# Altium PCB PCB1.PcbDoc
Units mil, origin at the board's own origin, x right, y up, seen from the top; angles counter-clockwise.
Board outline 2685 x 2837 mil, 2 copper layers (Top Layer, Bottom Layer); 50 components, 54 nets, 172 pads, 4 vias.
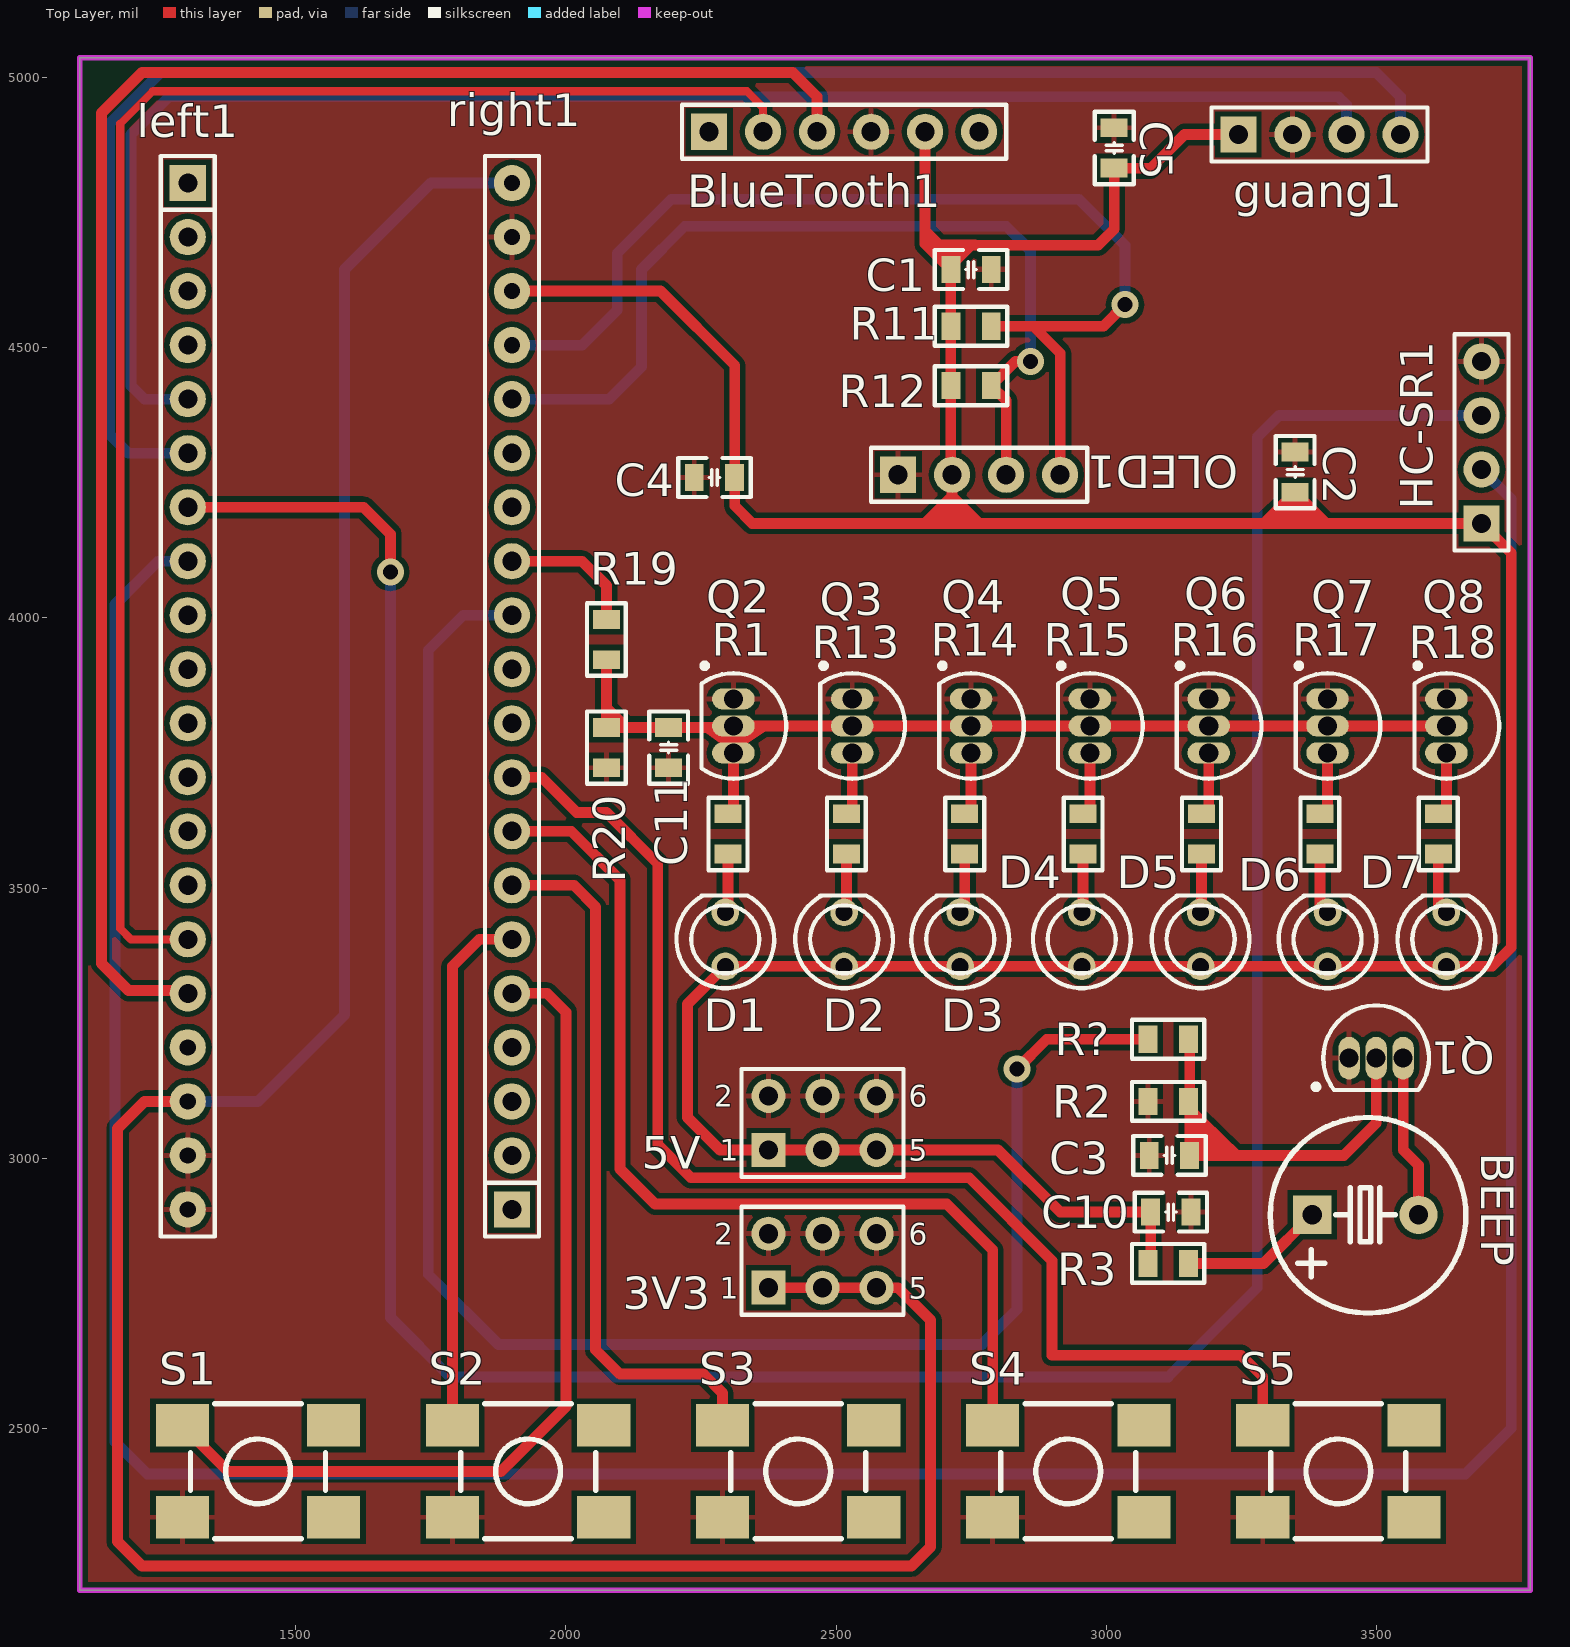
[diagram p0: Top Layer view]
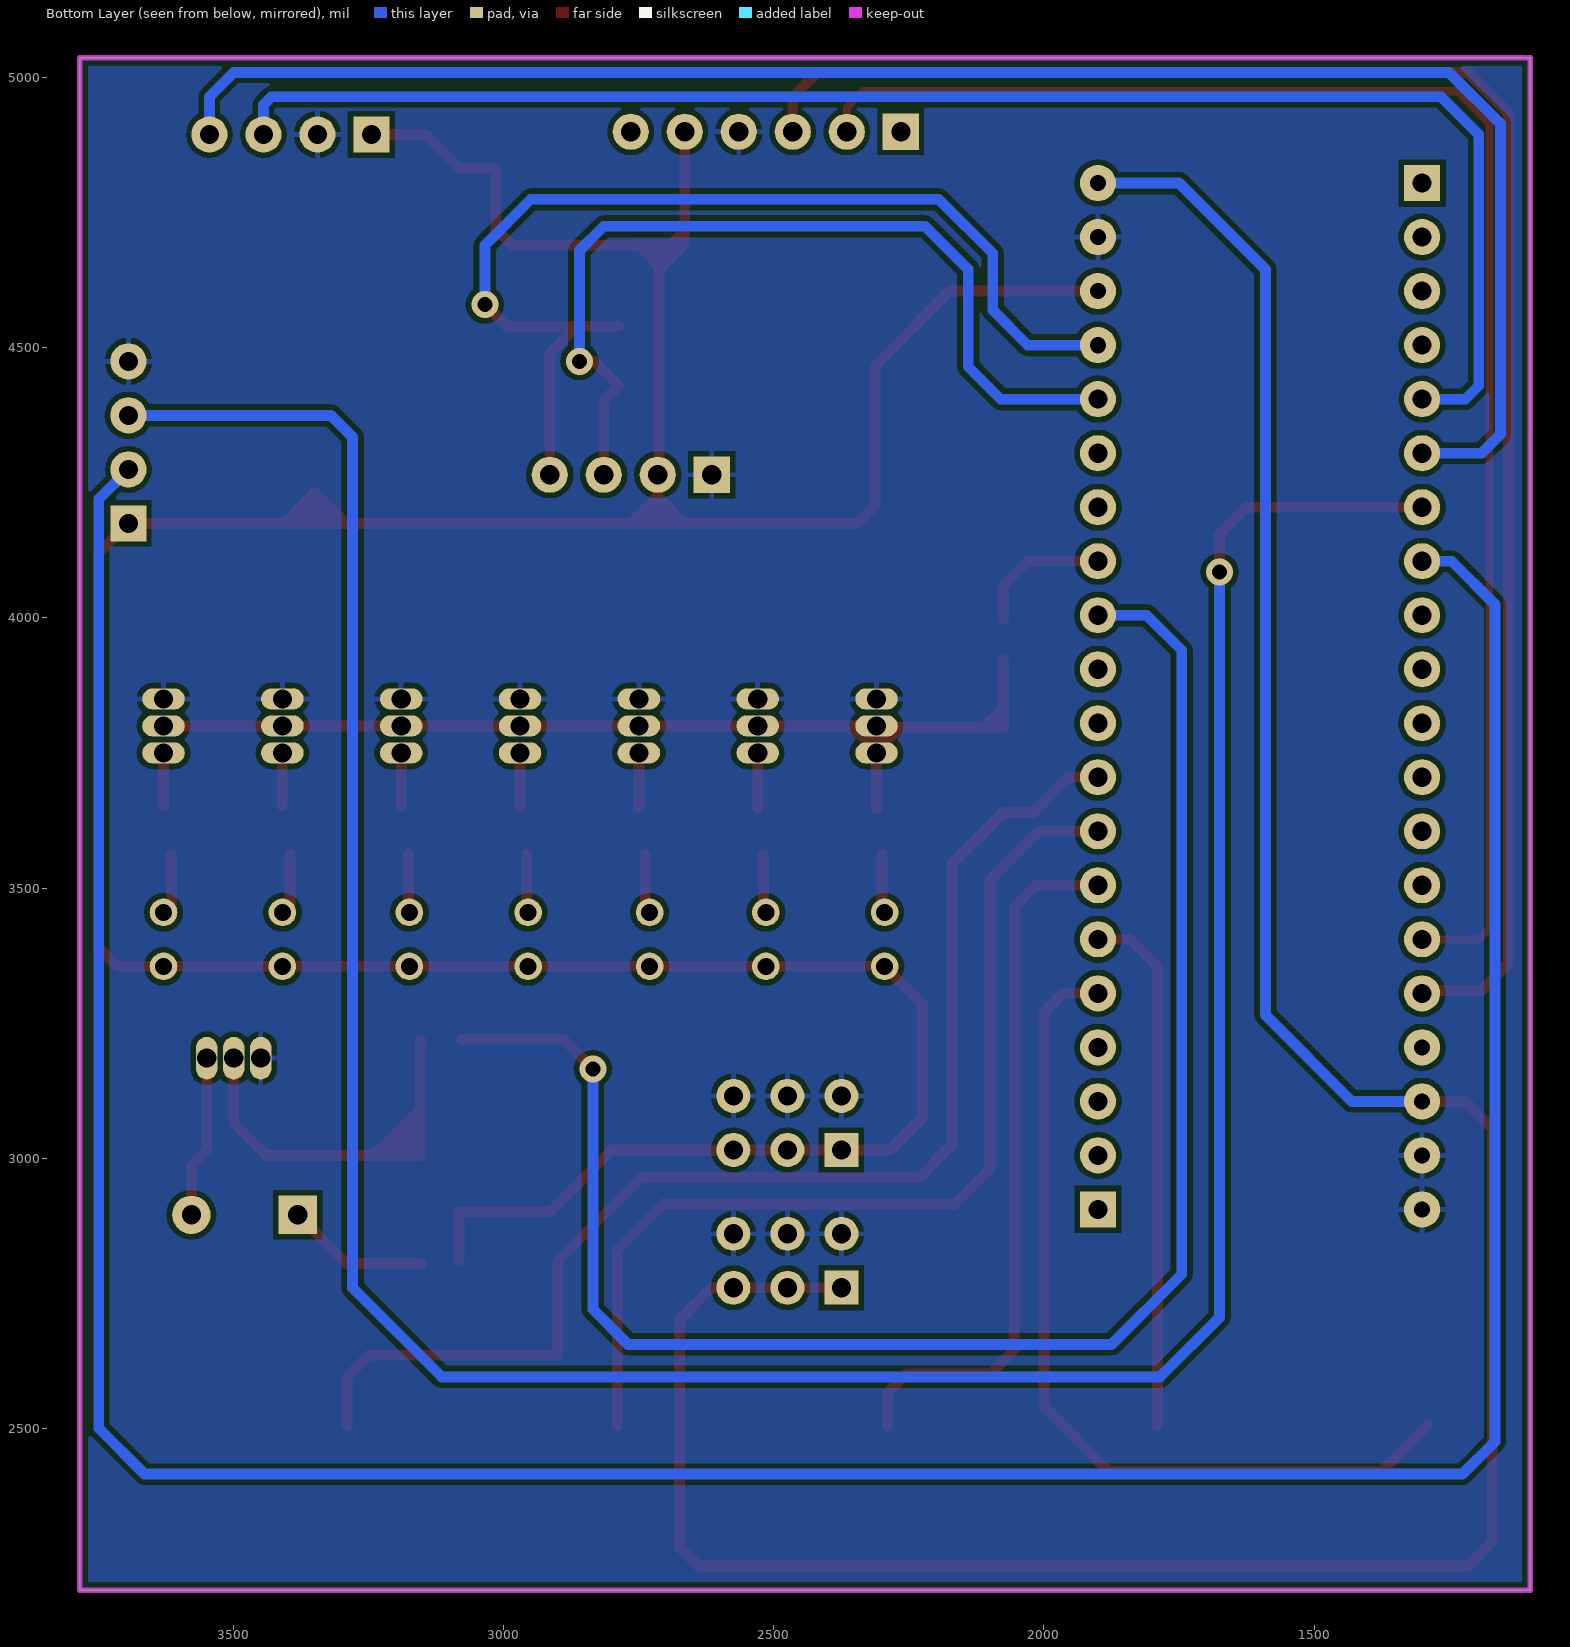
[diagram p1: Bottom Layer view, seen from below]

## Layer stack, top to bottom
Top Solder: solder mask 0.4, Solder Resist, Dk 3.5
Top Layer: signal copper 1.4
Dielectric 1: dielectric 12.6, FR-4, Dk 4.8
Bottom Layer: signal copper 1.4
Bottom Solder: solder mask 0.4, Solder Resist, Dk 3.5

## Board outline
1100,2200 3785,2200 3785,5037 1100,5037

## Design rules (kind name [scope] priority, off if disabled: settings)
Clearance [All] p1: gap=10
PolygonConnect [All] p1: connectstyle=Relief reliefconductorwidth=10 reliefentries=4 polygonreliefangle="90 Angle" airgapwidth=10
RoutingVias [All] p1: holewidth=28 width=50 viastyle="Through Hole" minholewidth=28 minwidth=50 maxholewidth=28 maxwidth=50
SolderMaskExpansion [All] p1: expansion=4
Width Width_3V3 [InNet('3V3')] p1: maxlimit=30 minlimit=20 preferedwidth=20
Width Width_5V [InNet('5V')] p2: maxlimit=30 minlimit=20 preferedwidth=20 minimp=50.000000 maximp=50.000000 favimp=50.000000
Width [All] p3: maxlimit=30 minlimit=10 preferedwidth=12 minimp=50.000000 maximp=50.000000 favimp=50.000000
30 further rules are at their usual default settings.

## Components (designator, comment, footprint, x,y, rotation, side; value= is the part's Value field where it differs from the comment)
3V3 "Header3X2" HDR2.54-LI-2x3P 2475,2810 r0 top (schematic designator JP1)
5V "Header3X2" HDR2.54-LI-2x3P 2475,3065 r0 top (schematic designator JP2)
BEEP "DC5V" "BEEP 5x9x5.5" 3480,2895 r270 top (schematic designator LS1)
BlueTooth1 "HDR-1X6" HDR2.54-LI-6P 2515,4900 r0 top
C1 "100nf" "C 0805_L" 2750,4645 r180 top
C2 "100nf" "C 0805_L" 3350,4270 r90 top
C3 "0.1uf" "C 0805_L" 3117.4,3005 r0 top
C4 "100nf" "C 0805_L" 2275,4260 r180 top
C5 "100nf" "C 0805_L" 3015,4870 r270 top
C10 "100nf" "C 0805_L" 3120,2900 r0 top
C11 "100nf" "C 0805_L" 2190,3760 r270 top
D1 "LED" LED_A2 2295,3405 r270 top
D2 "LED" LED_A2 2515,3405 r270 top
D3 "LED" LED_A2 2730,3405 r270 top
D4 "LED" LED_A2 2955,3405 r270 top
D5 "LED" LED_A2 3175,3405 r270 top
D6 "LED" LED_A2 3410,3405 r270 top
D7 "LED" LED_A2 3630,3405 r270 top
guang1 "HDR-1X4" HDR2.54-LI-4P 3395,4895 r0 top
HC-SR1 "HDR-1X4" HDR2.54-LI-4P 3695,4325 r90 top
left1 "HDR-1X20" HDR2.54-LI-20P 1300,3855 r270 top
OLED1 "HDR-1X4" HDR2.54-LI-4P 2765,4265 r0 top
Q1 "2N3904" TO-92A 3500,3185 r270 top
Q2 "2N3904" TO-92A 2310,3800 r180 top
Q3 "2N3904" TO-92A 2530,3800 r180 top
Q4 "2N3904" TO-92A 2750,3800 r180 top
Q5 "2N3904" TO-92A 2970,3800 r180 top
Q6 "2N3904" TO-92A 3190,3800 r180 top
Q7 "2N3904" TO-92A 3410,3800 r180 top
Q8 "2N3904" TO-92A 3630,3800 r180 top
R1 "300R" "R 0805_L" 2300,3600 r270 top
R2 "2K" "R 0805_L" 3115,3105 r180 top
R3 "33R" "R 0805_L" 3115,2805 r180 top
R11 "2K" "R 0805_L" 2750,4540 r0 top
R12 "2K" "R 0805_L" 2750,4430 r0 top
R13 "300R" "R 0805_L" 2519.17,3600 r270 top
R14 "300R" "R 0805_L" 2738.33,3600 r270 top
R15 "300R" "R 0805_L" 2957.5,3600 r270 top
R16 "300R" "R 0805_L" 3176.67,3600 r270 top
R17 "300R" "R 0805_L" 3395.83,3600 r270 top
R18 "300R" "R 0805_L" 3615,3600 r270 top
R19 "300R" "R 0805_L" 2075,3960 r270 top
R20 "10k" "R 0805_L" 2075,3760 r90 top
R? "2K" "R 0805_L" 3115,3220 r180 top
right1 "HDR-1X20" HDR2.54-LI-20P 1900,3855 r90 top
S1 "光敏开关" SW_PB4_A1 1430,2420 r0 top
S2 "超声波" SW_PB4_A1 1930,2420 r0 top
S3 "蓝牙" SW_PB4_A1 2430,2420 r0 top
S4 "增量" SW_PB4_A1 2930,2420 r0 top
S5 "减量" SW_PB4_A1 3430,2420 r0 top

## Footprints (in the part's own frame and the unit in brackets; to place one, negate y for a bottom-side part, rotate by r counter-clockwise, add the part's x,y. Pads: shape width x height; smd on the part's side, far side on the other; paste and mask are expansions set on the pad)
"BEEP 5x9x5.5" [mm] "5*9*5.5mm(脚距,直径,高度)        淘宝ID:黄晶宝石"
  rect 1.8x1.8 hole 0.9: 1(0,-2.5)
  round 1.8 hole 0.9: 2(0,2.5)
  silkscreen extent -4.57,-4.47 4.62,4.73, body extent -4.5,-4.5 4.5,4.5, height 5.45
"C 0805_L" [mil] "无极性贴片电容                                        淘宝ID:黄晶宝石"
  rect 35x50 smd: 1(-37.4,0) 2(37.4,0)
  silkscreen extent -67,-36 67,36, body extent -39,-24 39,24, height 20
HDR2.54-LI-2x3P [mm] "封装库来自淘宝卖家 ID：黄晶宝石"
  rect 1.6x1.6 hole 0.9: 1(-2.54,-1.27)
  round 1.6 hole 0.9: 2(-2.54,1.27) 3(0,-1.27) 4(0,1.27) 5(2.54,-1.27) 6(2.54,1.27)
  silkscreen extent -3.81,-2.54 3.81,2.54, body extent -3.81,-2.54 3.81,2.54, height 8.5
HDR2.54-LI-4P [mm] "排针，4脚"
  rect 1.7x1.7 hole 0.9: 1(-3.81,0)
  round 1.7 hole 0.9: 2(-1.27,0) 3(1.27,0) 4(3.81,0)
  silkscreen extent -5.08,-1.27 5.08,1.27, body extent -5.08,-1.27 5.08,1.27, height 8.5
HDR2.54-LI-6P [mm] "排针，6脚"
  rect 1.7x1.7 hole 0.9: 1(-6.35,0)
  round 1.7 hole 0.9: 2(-3.81,0) 3(-1.27,0) 4(1.27,0) 5(3.81,0) 6(6.35,0)
  silkscreen extent -7.62,-1.27 7.62,1.27, body extent -7.62,-1.27 7.62,1.27, height 8.5
HDR2.54-LI-20P [mm] "排针，20脚"
  rect 1.7x1.7 hole 0.9: 1(-24.13,0)
  round 1.7 hole 0.9: 2(-21.59,0) 3(-19.05,0) 4(-16.51,0) 5(-13.97,0) 6(-11.43,0) 7(-8.89,0) 8(-6.35,0) 9(-3.81,0) 10(-1.27,0) 11(1.27,0) 12(3.81,0) 13(6.35,0) 14(8.89,0) 15(11.43,0) 16(13.97,0)
  round 1.7 hole 0.762: 17(16.51,0) 18(19.05,0) 19(21.59,0) 20(24.13,0)
  silkscreen extent -25.4,-1.27 25.4,1.27, body extent -25.4,-1.27 25.4,1.27, height 8.5
LED_A2 [mm] "直径3MM二极管"
  round 1.3 hole 0.8: 1(1.27,0) 2(-1.27,0)
  silkscreen extent -2.06,-2.3 2.3,2.3
"R 0805_L" [mil] "1/8W贴片电阻"
  rect 35x50 smd: 1(-37.4,0) 2(37.4,0)
  silkscreen extent -67,-36 67,36, body extent -39,-25 39,25, height 20
SW_PB4_A1 [mil]
  rect 98.42x78.74 smd: 1(-140,85) 2(-140,-85) 3(140,-85) 4(140,85)
  silkscreen extent -125,-125 125,125, body extent -125,-125 125,125, height 236
TO-92A [mm] "TO, Flat Index; 3 In-Line, Axial Leads; Body Dia. 4.5mm; Leads 0.51 x 0.48 mm (max)"
  oval 2x1 hole 0.9: 1(0,-1.27) 2(0,0) 3(0,1.27)
  silkscreen extent -2.48,-2.95 1.5,2.48, body extent -2.5,-2.5 1.5,2.5, height 6.86

## Part data
3V3 5V: library part "Header 3X2", "3*2P接插件"
BEEP: library part BEEP, "蜂鸣器"
BlueTooth1: library part "Header 6", "6P接插件"
C1 C2 C3 C4 C5 C10 C11: library part C, "贴片电容"
D1 D2 D3 D4 D5 D6 D7: "发光二极管"
guang1 HC-SR1 OLED1: library part "Header 4", "4P接插件"
left1 right1: library part "Header 20", "20P接插件"
Q1 Q2 Q3 Q4 Q5 Q6 Q7 Q8: "NPN General Purpose Amplifier"
R1 R2 R3 R11 R12 R13 R14 R15 R16 R17 R18 R19 R20 R?: library part R, "贴片电阻"
S1 S2 S3 S4 S5: library part SW-PB4, "微动开关"

## Via types
v1: diameter 50, hole 28, Top Layer to Bottom Layer, 4 vias

## Nets (pads, with @x,y where several pads share a name; then routed paths per layer and width w, separated by ;. In a path a pad name is that pad's centre, name@x,y a point inside that pad or via, vN(x,y) a via of type N, cw(c..) or ccw(c..) an arc to the next point about the centre after c; other vN are vias at no path point)
3V3: 3V3.1 3V3.3 3V3.5 left1.18 right1.20 | length 5311.2
  Top Layer w20: left1.18 1220,3105 1170,3055 1170,2290 1215,2245 2640,2245 2675,2280 2675,2700 2615,2760 3V3.5 3V3.3 3V3.1
  Bottom Layer w20: left1.18 1430,3105 1590,3265 1590,4645 1750,4805 right1.20
5V: 5V.1 5V.3 5V.5 BlueTooth1.5 C1.2 C2.1 C4.1 C5.2 C10.1 D1.1 D2.1 D3.1 D4.1 D5.1 D6.1 D7.1 guang1.1 HC-SR1.1 OLED1.2 R3.2 R11.1 R12.1 right1.18 | length 7219.6
  Top Layer w20: right1.18 2175,4605 2312.4,4467.6 C4.1 2312.4,4207.6 2345,4175 2665,4175 2715,4225 ; BlueTooth1.5 2665,4692.6 C1.2 ; OLED1.2@2712.6,4267.4 C1.2 ; OLED1.2 2715,4225 ; R3.2@3082.6,2810 C10.1 2915,2900 2800,3015 5V.5 5V.3 5V.1 2285,3015 2225,3075 2225,3285 D1.1 D2.1 D3.1 D4.1 D5.1 D6.1 D7.1 3715,3355 3750,3390 3750,4120 HC-SR1.1 3407.6,4175 C2.1 3292.41,4175 2765,4175 2715,4225 ; guang1.1 3145,4895 3082.6,4832.6 C5.2 3015,4720 2985,4690 2750,4690 2712.6,4652.6 C1.2
A0_DO: guang1.3 left1.5 | length 2920.6
  Bottom Layer w20: left1.5 1220,4405 1195,4430 1195,4895 1265,4965 3430,4965 3445,4950 guang1.3
A1_AO: guang1.4 left1.6 | length 3252.5
  Bottom Layer w20: left1.6 1190,4305 1155,4340 1155,4915 1250,5010 3500,5010 3545,4965 guang1.4
A2_ECHO: HC-SR1.3 left1.7 | length 5571.2
  Top Layer w20: left1.7 1625,4205 1675,4155 v1(1675,4085)
  Bottom Layer w20: v1(1675,4085) 1675,2705 1785,2595 3115,2595 3280,2760 3280,4335 3320,4375 HC-SR1.3
A3_TRIG: HC-SR1.2 left1.8 | length 6161
  Bottom Layer w20: left1.8 1245,4105 1165,4025 1165,2475 1225,2415 3665,2415 3750,2500 3750,4220 HC-SR1.2
A4: left1.9
A5: left1.10
A6: left1.11
A7: left1.12
A15: right1.10
B0: left1.13
B1: left1.14
B3: right1.11
B4_BEEP: R?.2 right1.12 | length 3218.1
  Top Layer w20: v1(2835,3165) 2890,3220 R?.2
  Bottom Layer w20: right1.12 1810,4005 1745,3940 1745,2785 1875,2655 2770,2655 2835,2720 v1(2835,3165)
B5_PWM_LED: R19.1 right1.13 | length 256.2
  Top Layer w20: right1.13 2030,4105 2075,4060 R19.1
B6: right1.14
B7: right1.15
B8_OLED_SCL: OLED1.3 R12.2 right1.16 | length 1689.3
  Top Layer w20: OLED1.3 2815,4402.4 R12.2 2832.4,4475 v1(2860,4475)
  Bottom Layer w20: right1.16 2080,4405 2140,4465 2140,4645 2220,4725 2815,4725 2860,4680 v1(2860,4475)
B9_OLED_SDA: OLED1.4 R11.2 right1.17 | length 2013.4
  Top Layer w20: R11.2 2865,4540 ; OLED1.4 2915,4490 2865,4540 ; v1(3035,4580) 2995,4540 2865,4540
  Bottom Layer w20: right1.17 2030,4505 2095,4570 2095,4675 2195,4775 2950,4775 3035,4690 v1(3035,4580)
B10_TX: BlueTooth1.2 left1.15 | length 2895.6
  Top Layer w15: left1.15 1195,3405 1175,3425 1175,4915 1235,4975 2335,4975 2365,4945 BlueTooth1.2
B11_RX: BlueTooth1.3 left1.16 | length 3197.5
  Top Layer w20: left1.16 1295,3310 1190,3310 1140,3360 1140,4935 1215,5010 2420,5010 2465,4965 BlueTooth1.3
B12: right1.1
B13: right1.2
B14: right1.3
B15: right1.4
C13: left1.2
C14: left1.3
C15: left1.4
GND: 3V3.2 3V3.4 3V3.6 5V.2 5V.4 5V.6 BlueTooth1.4 C1.1 C2.2 C3.1 C4.2 C5.1 C10.2 C11.2 guang1.2 HC-SR1.4 left1.19 left1.20 OLED1.1 Q1.1 Q2.1 Q3.1 Q4.1 Q5.1 Q6.1 Q7.1 Q8.1 R2.2 R20.1 right1.19 S1.2 S2.2 S3.2 S4.2 S5.2
KEY0_G: right1.5 S1.1 | length 1639.4
  Top Layer w20: S1.1 1375,2420 1880,2420 2000,2540 2000,3270 1965,3305 right1.5
KEY1_C: right1.6 S2.1 | length 980.7
  Top Layer w20: S2.1 1790,3355 1840,3405 right1.6
KEY2_L: right1.7 S3.1 | length 1319.7
  Top Layer w20: right1.7 2015,3505 2055,3465 2055,2645 2100,2600 2255,2600 2290,2565 S3.1
KEY_DOWN: right1.9 S5.1 | length 2346.9
  Top Layer w20: right1.9 1955,3705 2020,3640 2075,3640 2170,3545 2170,3025 2231.5,2963.5 2746.5,2963.5 2900,2810 2900,2635 3250,2635 3290,2595 S5.1
KEY_UP: right1.8 S4.1 | length 1849.4
  Top Layer w20: right1.8 2010,3605 2100,3515 2100,2980 2165,2915 2705,2915 2790,2830 S4.1
NetC3_2: C3.2 Q1.2 R2.1 R?.1 | length 706.1
  Top Layer w20: R?.1@3152.4,3215.22 3154.8,3217.61 C3.2 3439.99,3004.99 3500,3065 Q1.2
NetC11_1: C11.1 Q2.2 Q2.3 Q3.2 Q4.2 Q5.2 Q6.2 Q7.2 Q8.2 R1.1 R19.2 R20.2 | length 1830.2
  Top Layer w20: R19.2 R20.2 C11.1 Q2.2@2307.4,3797.4 ; R1.1@2310,3647.41 Q2.3 Q2.2 Q3.2 Q4.2 Q5.2 Q6.2 Q7.2 Q8.2
NetD1_2: D1.2 R1.2 | length 102.6
  Top Layer w20: D1.2@2300,3460 R1.2
NetD2_2: D2.2 R13.2 | length 103.4
  Top Layer w20: D2.2@2519.16,3459.16 R13.2
NetD3_2: D3.2 R14.2 | length 99.3
  Top Layer w20: D3.2@2738.33,3463.33 R14.2
NetD4_2: D4.2 R15.2 | length 105.1
  Top Layer w20: D4.2@2957.5,3457.5 R15.2
NetD5_2: D5.2 R16.2 | length 105.9
  Top Layer w20: D5.2@3176.66,3456.66 R16.2
NetD6_2: D6.2 R17.2 | length 93.4
  Top Layer w20: D6.2@3395.83,3469.17 R17.2
NetD7_2: D7.2 R18.2 | length 113.8
  Top Layer w20: R18.2 3615,3470 D7.2
NetLS1_1: BEEP.1 R3.1 | length 266.4
  Top Layer w20: R3.1 3291.58,2805 BEEP.1
NetLS1_2: BEEP.2 Q1.3 | length 301.8
  Top Layer w20: Q1.3 3550,3015 3578.43,2986.57 BEEP.2
NetQ3_3: Q3.3 R13.1 | length 101.8
  Top Layer w20: R13.1@2530,3648.24 Q3.3
NetQ4_3: Q4.3 R14.1 | length 100.9
  Top Layer w20: R14.1@2750,3649.07 Q4.3
NetQ5_3: Q5.3 R15.1 | length 100.1
  Top Layer w20: R15.1@2970,3649.91 Q5.3
NetQ6_3: Q6.3 R16.1 | length 99.3
  Top Layer w20: R16.1@3190,3650.74 Q6.3
NetQ7_3: Q7.3 R17.1 | length 98.4
  Top Layer w20: R17.1@3410,3651.57 Q7.3
NetQ8_3: Q8.3 R18.1 | length 97.6
  Top Layer w20: R18.1@3630,3652.41 Q8.3
RES: left1.17
VBT: left1.1
pads on no net: BlueTooth1.1 BlueTooth1.6 S1.3 S1.4 S2.3 S2.4 S3.3 S3.4 S4.3 S4.4 S5.3 S5.4

## Polygon pours and split planes (outlines as drawn)
GND on Bottom Layer "BOTTOM_GND" (solid, remove dead copper, pour order 6): 680,5335 4380,5335 4385,5330 4385,1930 710,1930 650,1990
GND on Top Layer "BOTTOM_GND" (solid, remove dead copper, pour order 4): 860,5285 875,5270 4160,5270 4160,2040 4030,1910 4015,1895 740,1895

## Keep-outs
Keep-Out Layer:
  the board outline again, w10

## Other copper
Top Layer:
  region net NetC11_1: 2310,3750 2385,3800 2310,3800
  region net 5V: 2715,4225 2655,4165 2785,4165
  region net 5V: 3350,4232.6 3285,4167.59 3285,4165 3420,4165
  region net 5V: 2760,4700 2665.2,4700 2712.6,4652.6
  region net 5V: 2665,4692.6 2667.6,4690 2700,4690 2700,4695 2665,4730
  region net NetC3_2: 3152.4,3105 3154.8,3102.61 3154.8,3004.99 3244.99,3004.99 3250,3010
  region net NetC11_1: 2310,3750 2310,3800 2247.6,3800 2245,3797.4
  region net NetC11_1: 2075,3797.4 2075,3845 2077.4,3845 2125,3797.4

## Text inside footprints (layer, text, board x,y; h text height)
3V3: Top Overlay "6" at 2635,2840 h40; Top Overlay "5" at 2635,2740 h40; Top Overlay "2" at 2275,2840 h40; Top Overlay "1" at 2285,2740 h40
5V: Top Overlay "1" at 2285,2995 h40; Top Overlay "2" at 2275,3095 h40; Top Overlay "5" at 2635,2995 h40; Top Overlay "6" at 2635,3095 h40